# EAGLE board CNMAT-2310 v20 (EAGLE 9.7.0)
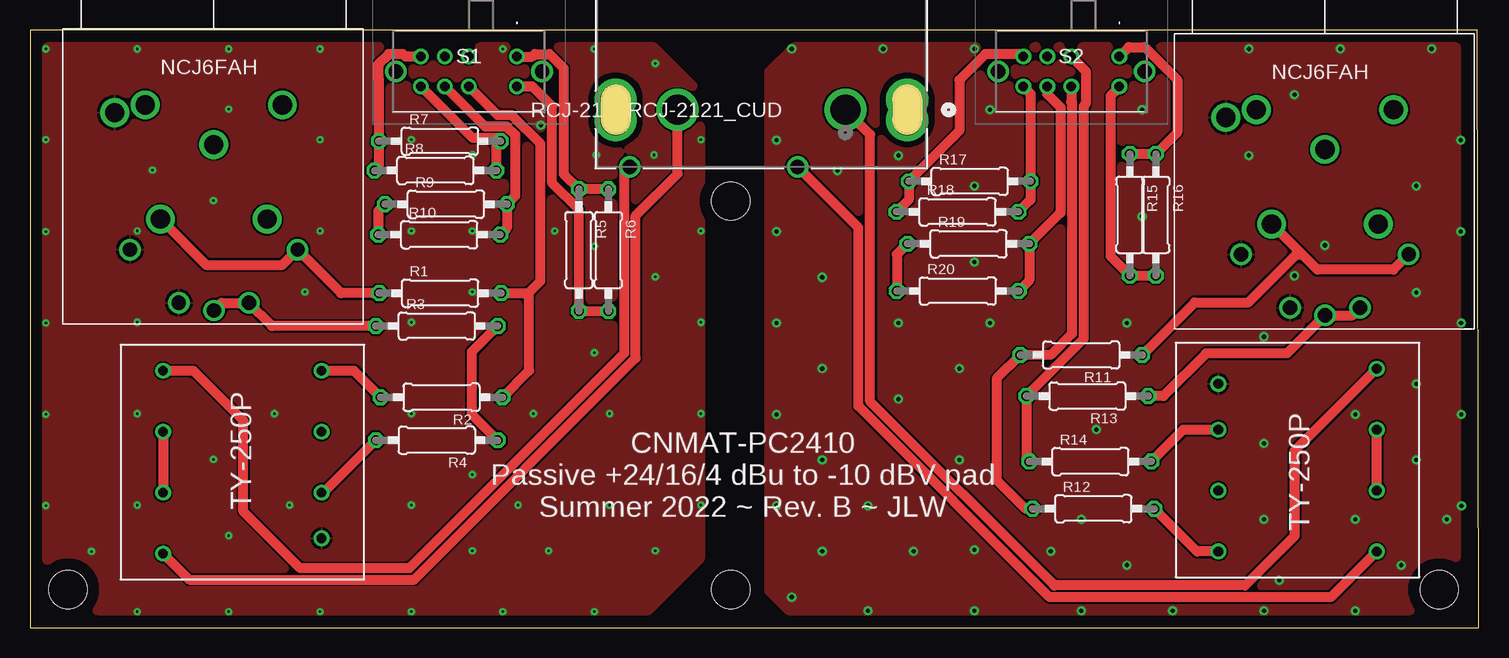
[diagram p0: board, top side]
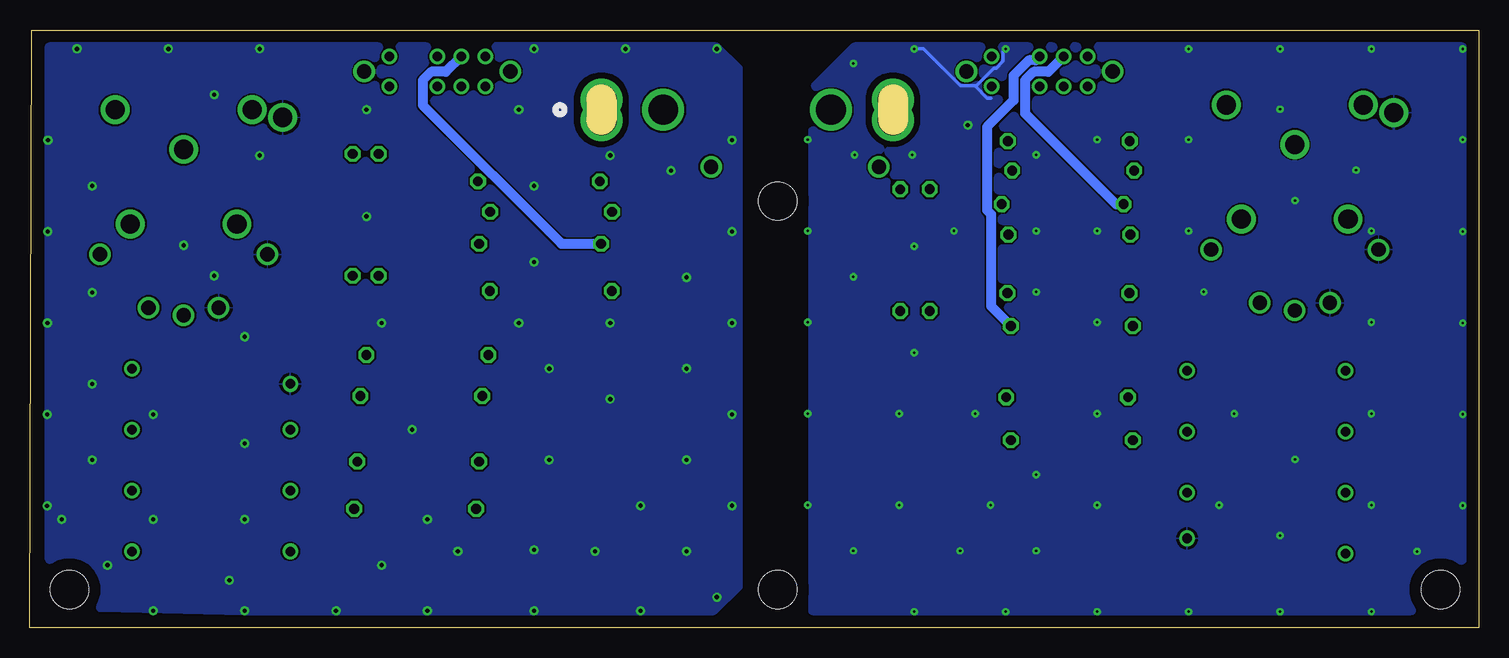
[diagram p1: board, bottom side, seen from below]

Size 120.76 x 49.84 mm. Coordinates in mm from the lower left corner, seen from the top.
Outline: 0,0 120.76,0 120.63,49.84 0,49.84 0,0
Copper layers (1*16): Top / Bottom
Stack-up Default Layer Stack: Top CuFoil:007 0.035mm / Dielectric-1 FR-4 0.2mm / Bottom CuFoil:007 0.035mm
Design rules "default": minimum track width 6mil, minimum drill 0.35mm, track to track 6mil, track to pad 6mil, pad to pad 6mil, via to via 6mil, smd to smd 6mil, copper to edge 40mil, drill to drill 6mil, minimum pad ring 10mil, minimum via ring 8mil, stop-mask expansion 4mil, vias tented up to drill 0mil, thermal gap 10mil
Holes 3.17 mm at 117.48,3.17 3.18,3.17 58.42,35.56 58.42,3.17

## Footprints (pad centres in the part's own frame; a part is rotated, then mirrored left to right if it is on the bottom)
RCJ-2121_CUD = drill 2.489 pad 2.997: 1 0,0; 3 13.995,0 | drill 1.194 pad 1.702: 2 3.988,4.75; 4 17.983,4.75 | smd 2.997 x 4.699: 5 -5.156,0; 6 19.152,0 | drill 2.489 pad 2.489: S_1_H1 -5.156,0.851; S_1_H2 -5.156,-0.851; S_2_H1 19.152,0.851; S_2_H2 19.152,-0.851
PR-D2.3XL6.5MM = drill 0.813 octagon: 1 -4.953,0; 2 5.207,0
EG2315 = drill 0.8 pad 1.3: 1 0,0; 2 4,0; 3 6,0; 4 8,0; 5 0,2.5; 6 4,2.5; 7 6,2.5; 8 8,2.5 | drill 1.2 pad 1.8: MH1 -2.1,1.25; MH2 10.1,1.25
TY-250P = drill 0.8: P$1 0,0; P$2 0,-3.81; P$3 0,-8.89; P$4 0,-13.97; P$5 13.208,-13.97; P$6 13.208,-8.89; P$7 13.208,-3.81; P$8 13.208,1.27
NCJ6FA-H = drill 1.194: P$1 -6.985,-18.415; P$2 6.985,-18.415; P$3 0,-23.495; P$R 2.921,-22.86; P$S -2.921,-22.86 | drill 1.6: P$G -8.255,-6.985; P$H1 -5.715,-6.35; P$H2 5.715,-6.35; P$H3 0,-9.652; P$T1 -4.445,-15.875; P$T2 4.445,-15.875

## Placement (x,y rotation side)
J1  RCJ-2121RCJ-2121_CUD  [RCJ-2121_CUD]  67.97,43.18 180 top
R1  100R  [PR-D2.3XL6.5MM]  34.06,27.89 0 top
R2  100R  [PR-D2.3XL6.5MM]  34.43,19.2 180 top
R3  100R  [PR-D2.3XL6.5MM]  33.78,25.15 0 top
R4  100R  [PR-D2.3XL6.5MM]  34.04,15.62 180 top
R5  100R  [PR-D2.3XL6.5MM]  45.76,31.61 270 top
R6  100R  [PR-D2.3XL6.5MM]  48.21,31.6 270 top
R7  100R  [PR-D2.3XL6.5MM]  34.04,40.56 0 top
R8  100R  [PR-D2.3XL6.5MM]  33.67,38.11 0 top
R9  100R  [PR-D2.3XL6.5MM]  34.54,35.31 0 top
R10  100R  [PR-D2.3XL6.5MM]  33.99,32.77 0 top
R11  100R  [PR-D2.3XL6.5MM]  87.76,22.73 180 top
R12  100R  [PR-D2.3XL6.5MM]  88.52,9.91 0 top
R13  100R  [PR-D2.3XL6.5MM]  88.27,19.3 180 top
R14  100R  [PR-D2.3XL6.5MM]  88.27,13.84 0 top
R15  100R  [PR-D2.3XL6.5MM]  91.69,34.54 270 top
R16  100R  [PR-D2.3XL6.5MM]  93.85,34.54 270 top
R17  100R  [PR-D2.3XL6.5MM]  78.21,37.21 0 top
R18  100R  [PR-D2.3XL6.5MM]  77.19,34.67 0 top
R19  100R  [PR-D2.3XL6.5MM]  78.11,32 0 top
R20  100R  [PR-D2.3XL6.5MM]  77.22,28.07 0 top
S1  EG2315  [EG2315]  40.59,47.62 180 top
S2  EG2315  [EG2315]  90.81,47.62 180 top
U$1  TY-250P  [TY-250P]  24.31,7.44 180 top
U$2  TY-250P  [TY-250P]  99.06,20.32 0 top
U$3  NCJ6FA-H1  [NCJ6FA-H]  15.32,49.93 0 top
U$4  NCJ6FA-H1  [NCJ6FA-H]  107.95,49.53 0 top

## Library data of the parts
J1 = RCJ-2121; COPYRIGHT: Copyright (C) 2022 Ultra Librarian. All rights reserved.; MANUFACTURER_PART_NUMBER: RCJ-2121; MFR_NAME: CUI Devices
R1-R20 = OPL_Resistor; MPN: FHCFR-1/4W-101J
S1 S2 = EG2315; DESCRIPTION: Slide Switches SIDE OP PC MNT DP3T; HEIGHT: 4.7mm; MANUFACTURER_NAME: E-Switch; MANUFACTURER_PART_NUMBER: EG2315
U$1 U$2 = TY-250P
U$3 U$4 = NCJ6FA-H

## Nets
GND1: U$1.P$1 U$3.P$1 U$3.P$G U$3.P$S
GND2: U$2.P$1 U$4.P$1 U$4.P$G U$4.P$S
N$1: U$2.P$6 U$2.P$7
N$2: R1.1 U$3.P$2 U$3.P$T1
N$3: R3.2 R4.1 S1.2
N$4: R1.2 R2.1 S1.6
N$5: R5.2 R6.2 S1.5
N$6: R5.1 R6.1 S1.1
N$7: R7.2 R8.2 S1.8
N$8: R7.1 R8.1 S1.4
N$9: R9.2 R10.2 S1.7
N$10: R9.1 R10.1 S1.3
N$11: R2.2 U$1.P$4
N$12: R4.2 U$1.P$2
N$13: U$1.P$6 U$1.P$7
N$14: J1.3 U$1.P$8
N$15: J1.4 U$1.P$5
N$16: R3.1 U$3.P$3 U$3.P$R
N$17: R11.1 U$4.P$2 U$4.P$T1
N$19: R13.2 R14.1 S2.2
N$20: R11.2 R12.1 S2.6
N$21: R15.2 R16.2 S2.5
N$22: R15.1 R16.1 S2.1
N$23: R17.2 R18.2 S2.8
N$24: R17.1 R18.1 S2.4
N$25: R19.2 R20.2 S2.7
N$26: R19.1 R20.1 S2.3
N$27: R12.2 U$2.P$4
N$28: R14.2 U$2.P$2
N$30: J1.1 U$2.P$8
N$31: J1.2 U$2.P$5
N$35: R13.1 U$4.P$3 U$4.P$R

## Tracks (layer width: path | path; a pad name or v marks a point on that pad's centre or on a via)
GND1  (via drill 0.2, 0.35)
  Bottom 0.305: v39.42,48.26 39.63,48.05 39.63,47.23 40.19,46.67 40.41,46.67 41.91,45.16 41.91,45.09 | 40.64,44.17 40.99,44.17 41.91,45.09 | 41.91,45.09 41.99,45.17 43.19,45.17 46.28,48.26 v47.04,48.26
  other vias: 1.32,48.26 1.32,40.69 1.32,33.02 1.32,25.4 1.32,17.78 1.32,10.16 8.94,48.26 16.56,48.26 24.18,48.26 5.13,6.35 8.94,1.32 16.56,1.32 24.18,1.32 31.8,1.32 39.42,1.32 47.04,1.32 55.93,10.21 55.93,17.83 55.93,25.45 55.93,33.07 55.93,40.69 52.12,47.04 10.21,38.15 8.94,33.07 8.94,25.45 8.94,17.83 8.94,10.21 16.56,7.67 15.29,14.02 16.56,43.23 15.29,35.61 24.18,40.69 24.18,33.07 22.91,27.99 20.37,17.83 21.64,10.21 31.8,40.69 31.8,33.07 31.8,25.45 31.8,17.83 31.8,10.21 36.88,39.42 36.88,33.07 36.88,27.99 52.02,39.42 52.12,29.26 47.04,31.8 47.04,22.91 41.96,17.83 36.88,12.75 48.31,17.83 48.31,10.21 52.12,6.4 43.23,6.4 36.88,6.4 40.69,10.21 43.74,33.07 47.21,39.42 42.59,41.91
  pour Bottom: 0.63,49.53 0.63,0.89 1.52,0 50.67,0 55.88,5.21 55.88,45.09 51.44,49.53
  pour Top: 0.89,49.02 51.94,49.02 56.26,44.7 56.26,5.59 51.44,0.76 0.89,0.76
  pour Bottom: 0.63,49.53 0.63,0.89 1.52,0 50.67,0 55.88,5.21 55.88,45.09 51.44,49.53
  pour Bottom: 0.63,49.53 0.63,0.89 1.52,0 50.67,0 55.88,5.21 55.88,45.09 51.44,49.53
  pour Bottom: 0.63,41.91 0.63,-6.73 1.52,-7.62 50.67,-7.62 55.88,-2.41 55.88,37.47 51.44,41.91
GND2  (via drill 0.35)
  other vias: 62.23,10.16 62.23,17.78 62.23,25.4 62.23,33.02 62.23,40.64 63.5,48.26 71.12,48.26 78.74,48.26 63.5,2.54 67.31,38.1 72.39,39.37 80.01,43.18 78.74,36.83 78.74,30.48 66.04,29.21 66.04,21.59 72.39,25.4 66.04,13.97 66.04,6.35 69.85,10.16 73.66,6.35 69.85,1.39 78.74,1.39 72.39,19.05 77.47,13.97 85.09,6.35 77.47,21.59 80.01,25.4 87.63,1.39 95.25,1.39 102.87,1.39 110.49,1.39 114.3,5.2 118.11,9.01 101.6,48.26 109.22,48.26 116.84,48.26 119.26,40.64 119.28,33.02 119.3,25.4 119.32,17.78 119.34,10.16 105.41,44.45 115.57,36.83 115.57,27.94 115.57,20.32 115.57,13.97 101.6,39.37 110.49,9.01 102.87,9.01 91.44,5.2 87.63,9.01 78.74,6.47 104.14,3.93 110.49,17.78 102.87,15.36 102.87,24.25 105.41,29.33 107.95,31.87 92.71,34.29 92.71,43.18 91.44,25.4 88.9,16.51
  pour Bottom: 119.51,1.81 119.51,49.53 64.14,49.53 61.34,46.74 61.34,3.3 64.52,0.13 119.25,1.4
  pour Top: 119.25,49.53 119.25,0.25 65.15,0.25 61.21,4.19 61.21,46.48 64.26,49.53
  pour Top: 119.25,49.53 119.25,0.25 63.88,0.25 61.21,2.92 61.21,46.48 64.26,49.53
N$1
  Top 0.813: U$2.P$6 U$2.P$7
N$2
  Top 0.813: U$3.P$T1 14.69,30.25 21.04,30.25 U$3.P$2 25.94,27.89 R1.1
N$3
  Top 0.813: R3.2 36.83,22.99 36.83,17.78 R4.1
  Bottom 0.813: S1.2 36.91,47.3 37.49,47.3 38.77,46.03 38.77,43.96 40.97,41.76 40.97,34.8 40.64,34.47 40.64,26.8 R3.2
N$4
  Top 0.813: R2.1 41.61,21.43 41.61,27.94 | R1.2 41.55,27.89 41.61,27.94 | S1.6 38.97,42.75 40.15,42.75 42.56,40.34 42.56,28.89 41.61,27.94
N$5
  Top 0.813: R6.2 48.2,26.4 R5.2 45.76,34.84 43.52,37.08 43.52,43.48 41.88,45.12 S1.5
N$6
  Top 0.813: S1.1 41.88,47.62 42.09,47.83 43.3,47.83 44.49,46.64 44.49,37.83 R5.1 48.2,36.56 R6.1
N$7
  Top 0.813: S1.8 36.9,40.82 38.99,40.82 R7.2 38.88,40.2 R8.2
N$8
  Top 0.813: R8.1 29.08,38.48 R7.1 29.08,45.72 29.03,45.77 29.03,46.98 29.89,47.83 31.09,47.83 31.3,47.62 S1.4
N$9
  Top 0.813: R10.2 39.75,33.33 R9.2 40.46,36.02 40.46,41.07 39.75,41.78 37.93,41.78 S1.7
N$10
  Top 0.813: R9.1 29.03,34.75 R10.1
  Bottom 0.813: S1.3 35.88,46.34 37.09,46.34 37.8,45.63 37.8,42.88 30.23,35.31 R9.1
N$11
  Top 0.813: R2.2 27.02,21.41 U$1.P$4
N$12
  Top 0.813: R4.2 24.45,11.25 U$1.P$2
N$13
  Top 0.813: U$1.P$6 U$1.P$7
N$14
  Top 0.813: J1.3 53.98,37.83 50.5,34.34 50.5,22.46 32.02,3.99 13.28,3.99 U$1.P$8
N$15
  Top 0.813: U$1.P$5 13.64,21.41 17.78,17.26 17.78,9.71 22.53,4.95 31.62,4.95 49.53,22.86 49.53,37.97 J1.4
N$16
  Top 0.813: U$3.P$3 15.96,27.07 U$3.P$R 20.17,25.15 R3.1
N$17
  Top 0.813: U$4.P$2 113.67,29.84 107.31,29.84 106.05,31.11 | 106.05,31.11 U$4.P$T1 | R11.1 97.1,27.12 101.57,27.12 105.56,31.11 106.05,31.11
N$19
  Top 0.813: R14.1 83.06,14.1 R13.2 87.83,24.08 87.83,43.48 88.02,43.66 88.02,46.41 S2.2
N$20
  Top 0.813: R12.1 82.98,9.91 80.57,12.32 80.57,20.75 R11.2 85.09,22.73 86.87,24.51 86.87,43.79 86.81,43.85 S2.6
N$21
  Top 0.813: R16.2 R15.2 90.07,30.96 90.07,44.35 90.81,45.09 S2.5
N$22
  Top 0.813: R15.1 R16.1 95.63,41.28 95.63,45.71 92.93,48.41 91.59,48.41 S2.1
N$23
  Top 0.813: R18.2 83.41,35.69 R17.2 83.41,44.52 S2.8
N$24
  Top 0.813: R18.1 73.25,35.69 R17.1 77.47,41.43 77.47,45.66 79.64,47.83 82.6,47.83 S2.4
N$25
  Top 0.813: R20.2 83.31,28.96 R19.2 85.9,34.59 85.9,43.39 84.81,44.49 S2.7
N$26
  Top 0.813: R19.1 72.26,31.11 R20.1
  Bottom 0.813: S2.3 86.09,46.34 87.31,46.34 88.02,45.63 88.02,43.57 76.45,32 R19.1
N$27
  Top 0.813: U$2.P$4 97.28,6.35 R12.2
N$28
  Top 0.813: R14.2 96.14,16.51 U$2.P$2
N$30
  Top 0.813: U$2.P$8 105.41,14.73 105.41,7.62 101.3,3.5 85.39,3.5 70.03,18.87 70.03,41.12 J1.1
N$31
  Top 0.813: U$2.P$5 108.46,2.54 85,2.54 69.06,18.47 69.06,33.35 J1.2
N$35
  Top 0.813: U$4.P$R 110.24,26.04 U$4.P$3 104.78,22.86 98.04,22.86 94.49,19.3 R13.1

## Text on the board
tNames: CNMAT-PC2410 / Passive +24/16/4 dBu to -10 dBV pad / Summer 2022 ~ Rev. B ~ JLW